# EAGLE board DaftPunk (EAGLE 5.08)
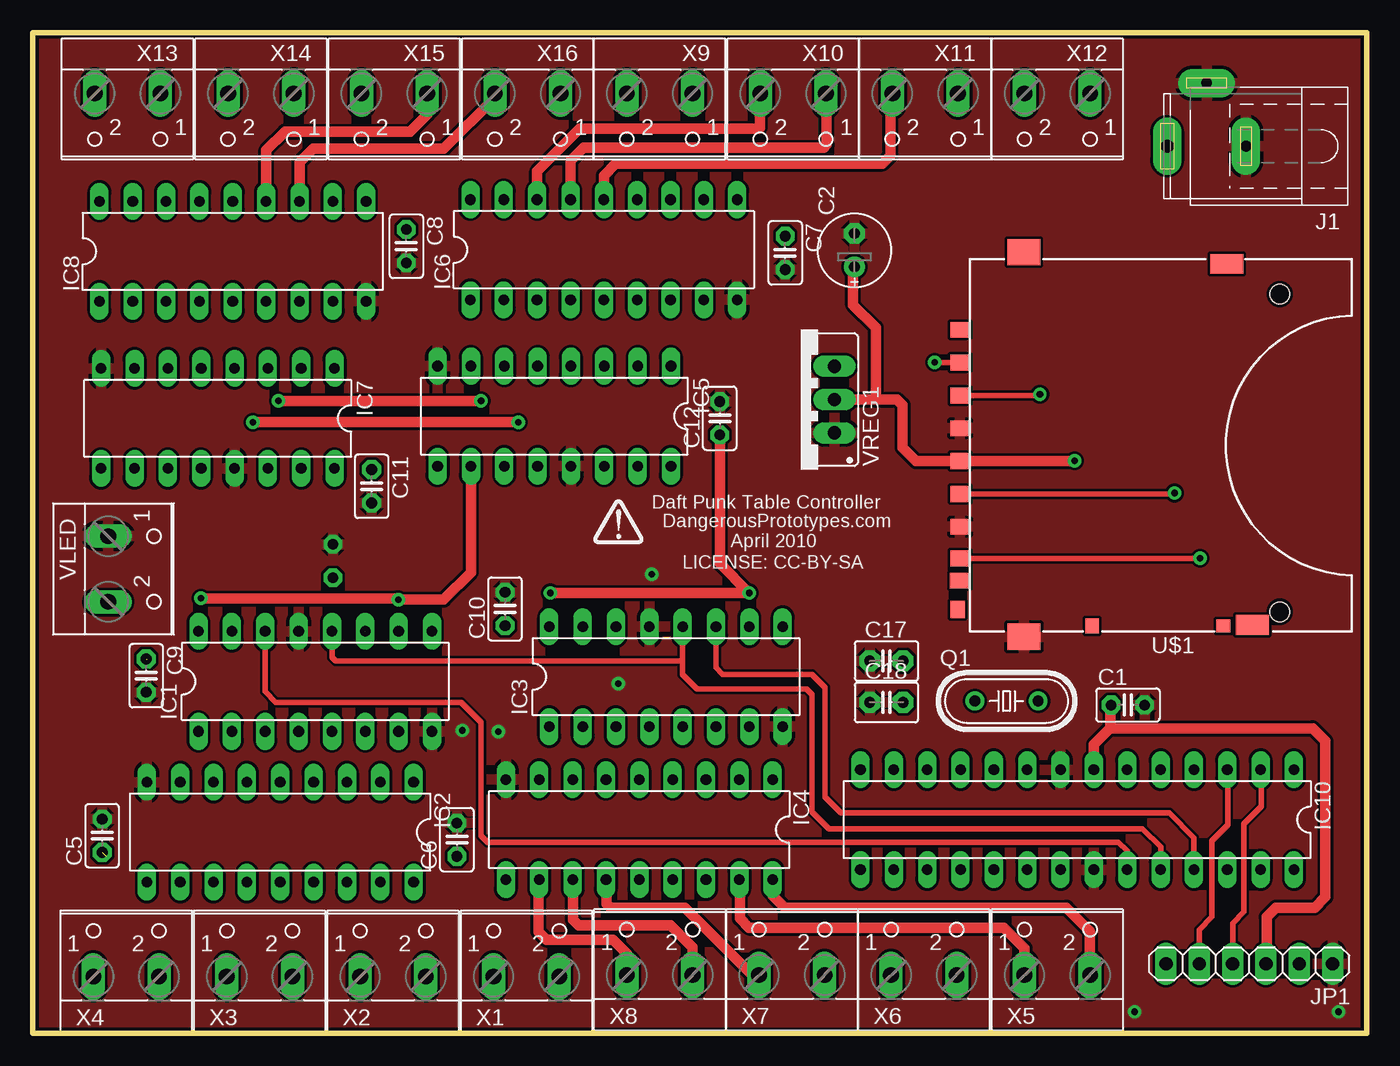
[diagram p0: board, top side]
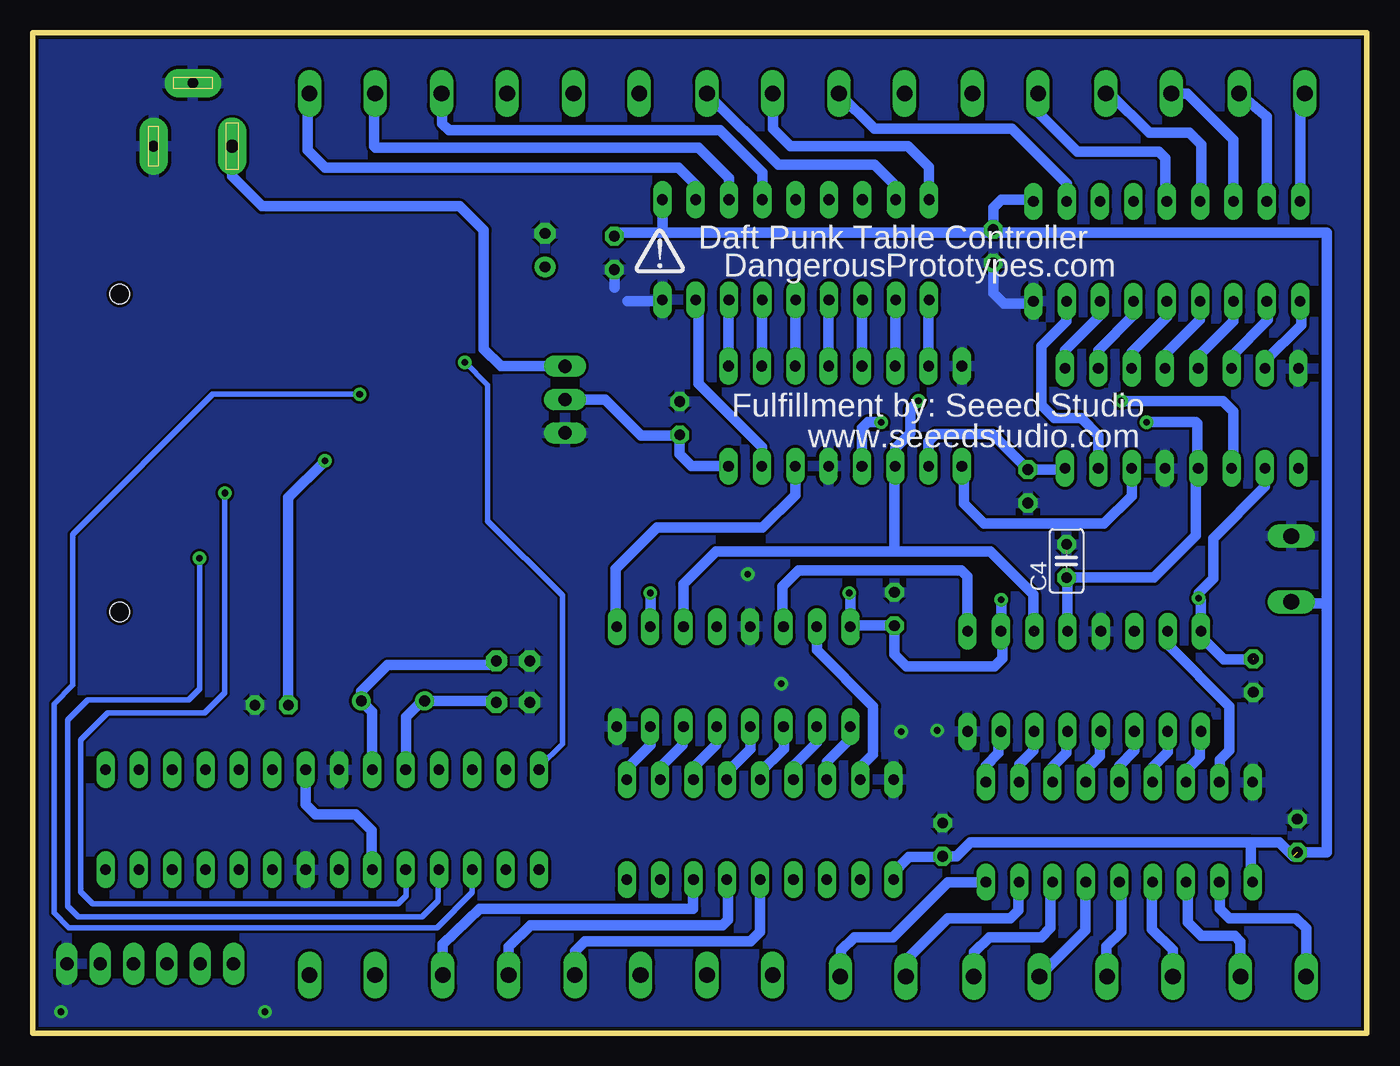
[diagram p1: board, bottom side, seen from below]

Size 101.6 x 76.2 mm. Coordinates in mm from the lower left corner, seen from the top.
Outline: 0,0 101.6,0 101.6,76.2 0,76.2 0,0
Copper layers (1*16): Top 0.035mm / dielectric 1.5mm / Bottom 0.035mm
Design rules "SparkFun": minimum track width 8mil, minimum drill 20mil, track to track 8mil, track to pad 8mil, pad to pad 8mil, via to via 8mil, smd to smd 8mil, copper to edge 10mil, drill to drill 8mil, minimum pad ring 12mil, minimum via ring 10mil, stop-mask expansion 4mil, vias tented up to drill 25mil, thermal gap 10mil

## Footprints (pad centres in the part's own frame; a part is rotated, then mirrored left to right if it is on the bottom)
C025-025X050 = drill 0.813 octagon: 1 -1.27,0; 2 1.27,0
E2,5-6E = drill 0.813 pad 1.575 round: + -1.27,0 | drill 0.813 pad 1.575 octagon: - 1.27,0
C2.5-3 = drill 0.813 pad 1.6 octagon: 1 -1.27,0; 2 1.27,0
DIL16 = drill 0.813 long: 1 -8.89,-3.81; 2 -6.35,-3.81; 3 -3.81,-3.81; 4 -1.27,-3.81; 5 1.27,-3.81; 6 3.81,-3.81; 7 6.35,-3.81; 8 8.89,-3.81; 9 8.89,3.81; 10 6.35,3.81; 11 3.81,3.81; 12 1.27,3.81; 13 -1.27,3.81; 14 -3.81,3.81; 15 -6.35,3.81; 16 -8.89,3.81
DIL18 = drill 0.813 long: 1 -10.16,-3.81; 2 -7.62,-3.81; 3 -5.08,-3.81; 4 -2.54,-3.81; 5 0,-3.81; 6 2.54,-3.81; 7 5.08,-3.81; 8 7.62,-3.81; 9 10.16,-3.81; 10 10.16,3.81; 11 7.62,3.81; 12 5.08,3.81; 13 2.54,3.81; 14 0,3.81; 15 -2.54,3.81; 16 -5.08,3.81; 17 -7.62,3.81; 18 -10.16,3.81
DIL28-N = drill 0.813 long: 1 -16.51,-3.81; 2 -13.97,-3.81; 3 -11.43,-3.81; 4 -8.89,-3.81; 5 -6.35,-3.81; 6 -3.81,-3.81; 7 -1.27,-3.81; 8 1.27,-3.81; 9 3.81,-3.81; 10 6.35,-3.81; 11 8.89,-3.81; 12 11.43,-3.81; 13 13.97,-3.81; 14 16.51,-3.81; 15 16.51,3.81; 16 13.97,3.81; 17 11.43,3.81; 18 8.89,3.81; 19 6.35,3.81; 20 3.81,3.81; 21 1.27,3.81; 22 -1.27,3.81; 23 -3.81,3.81; 24 -6.35,3.81; 25 -8.89,3.81; 26 -11.43,3.81; 27 -13.97,3.81; 28 -16.51,3.81
SPC4078 = drill 0.8 pad 2.184 long: 1 -3,0; 2 0,-4.8 | drill 1 pad 2.184 long: 3 3,0
1X06 = drill 1.016 long: 1 -6.35,0; 2 -3.81,0; 3 -1.27,0; 4 1.27,0; 5 3.81,0; 6 6.35,0
HC49/S = drill 0.813 round: 1 -2.413,0; 2 2.413,0
SD-MMC_SOCKET-PP = smd 1.2 x 1.5: 1 6.88,29.85; 2 4.38,29.85; 3 1.88,29.85; 4 -0.62,29.85; 5 -3.12,29.85; 6 -5.62,29.85; 7 -8.04,29.85; 8 -9.728,29.87; 9 9.38,29.85 | smd 1.5 x 2.5: 12 -13.1,7.6; 13 14.402,9.525 | smd 2 x 2.5: 14 -14,25; 15 15.3,25 | smd 1 x 1.05: CD -13.18,9.8 | smd 1.3 x 1.1: SW -11.938,30.048 | smd 1.15 x 1: WP -13.18,19.8 | hole 1.5: -12.1,5.5; 12.1,5.5
W237-102 = drill 1.194 long: 1 -2.5,-1.27; 2 2.5,-1.27
TO220-V = drill 1.016 long: 1 -2.54,0; 2 0,0; 3 2.54,0

## Placement (x,y rotation side)
C1  [C025-025X050]  83.41,24.99 0 top
C2  [E2,5-6E]  62.59,59.64 90 top
C4  [C025-025X050]  22.86,35.97 90 bottom
C5  [C025-025X050]  5.28,15.04 90 top
C6  [C025-025X050]  32.31,14.73 90 top
C7  [C025-025X050]  57.3,59.44 270 top
C8  [C025-025X050]  28.45,59.94 270 top
C9  [C025-025X050]  8.64,27.23 270 top
C10  [C025-025X050]  35.97,32.31 90 top
C11  [C025-025X050]  25.81,41.66 270 top
C12  [C025-025X050]  52.32,46.84 90 top
C17  22pF  [C2.5-3]  65.02,28.35 0 top
C18  22pF  [C2.5-3]  65.02,25.2 0 top
IC1  74HC595N  [DIL16]  21.51,26.79 0 top
IC2  [DIL18]  18.84,15.3 180 top
IC3  74HC595N  [DIL16]  48.23,27.16 0 top
IC4  [DIL18]  46.2,15.51 180 top
IC5  74HC595N  [DIL16]  39.72,47 180 top
IC6  [DIL18]  43.49,59.68 0 top
IC7  74HC595N  [DIL16]  14.09,46.83 180 top
IC8  [DIL18]  15.23,59.56 0 top
IC10  ATMEGA328P  [DIL28-N]  79.55,16.26 180 top
J1  [SPC4078]  89.41,67.56 180 top
JP1  [1X06]  92.66,5.28 180 top
Q1  16MHZ  [HC49/S]  74.17,25.3 0 top
U$1  SD_CARD_SOCKETSD  [SD-MMC_SOCKET-PP]  100.48,44.2 90 top
U$2  [DP_LOGO]  44.6,37.9 0 top
U$3  [DP_LOGO]  53.85,58.52 0 bottom
VLED  [W237-102]  7.01,35.36 270 top
VREG1  LD1117-3.3  [TO220-V]  61.06,48.26 90 top
X1  [W237-102]  37.59,5.59 0 top
X2  [W237-102]  27.43,5.59 0 top
X3  [W237-102]  17.27,5.59 0 top
X4  [W237-102]  7.11,5.59 0 top
X5  [W237-102]  78.03,5.69 0 top
X6  [W237-102]  67.87,5.69 0 top
X7  [W237-102]  57.81,5.69 0 top
X8  [W237-102]  47.75,5.69 0 top
X9  [W237-102]  47.75,70.31 180 top
X10  [W237-102]  57.91,70.31 180 top
X11  [W237-102]  67.97,70.31 180 top
X12  [W237-102]  78.03,70.31 180 top
X13  [W237-102]  7.21,70.31 180 top
X14  [W237-102]  17.37,70.31 180 top
X15  [W237-102]  27.53,70.31 180 top
X16  [W237-102]  37.69,70.31 180 top

## Library data of the parts
C1 C2 C4-C12 = rcl
C17 C18 = capacitor-wima
IC1 IC3 IC5 IC7 = 74xx-eu
IC2 IC4 IC6 IC8 = uln-udn
IC10 U$2 U$3 VREG1 = dp_devices
J1 = con-jack
JP1 = pinhead
Q1 = crystal
U$1 = SparkFun-3-2-07
VLED X1-X16 = con-wago-500

## Nets
CS: IC10.14 U$1.1
DI: IC10.17 U$1.2
DO: IC10.18 U$1.7
GND: C1.2 C2.- C4.2 C5.2 C6.2 C7.2 C8.2 C9.2 C10.2 C11.2 C12.2 C17.1 C18.1 IC1.8 IC1.13 IC2.9 IC3.8 IC3.13 IC4.9 IC5.8 IC5.13 IC6.9 IC7.8 IC7.13 IC8.9 IC10.8 IC10.22 J1.1 J1.2 JP1.1 U$1.3 U$1.6 U$1.14 VLED.1 VREG1.1
N$1: IC1.15 IC2.8
N$2: IC1.1 IC2.7
N$3: IC1.2 IC2.6
N$4: IC1.3 IC2.5
N$5: IC1.4 IC2.4
N$6: IC1.5 IC2.3
N$7: IC1.6 IC2.2
N$8: IC1.7 IC2.1
N$9: IC3.15 IC4.8
N$10: IC3.1 IC4.7
N$11: IC3.2 IC4.6
N$12: IC3.3 IC4.5
N$13: IC3.4 IC4.4
N$14: IC3.5 IC4.3
N$15: IC3.6 IC4.2
N$16: IC3.7 IC4.1
N$17: IC5.15 IC6.8
N$18: IC5.1 IC6.7
N$19: IC5.2 IC6.6
N$20: IC5.3 IC6.5
N$21: IC5.4 IC6.4
N$22: IC5.5 IC6.3
N$23: IC5.6 IC6.2
N$24: IC5.7 IC6.1
N$25: IC7.15 IC8.8
N$26: IC7.1 IC8.7
N$27: IC7.2 IC8.6
N$28: IC7.3 IC8.5
N$29: IC7.4 IC8.4
N$30: IC7.5 IC8.3
N$31: IC7.6 IC8.2
N$32: IC7.7 IC8.1
N$33: IC1.9 IC3.14
N$34: IC3.9 IC5.14
N$35: IC5.9 IC7.14
N$36: IC2.18 X1.2
N$37: IC2.17 X1.1
N$38: IC2.16 X2.2
N$39: IC2.15 X2.1
N$40: IC2.14 X3.2
N$41: IC2.13 X3.1
N$42: IC2.12 X4.2
N$43: IC2.11 X4.1
N$44: IC4.18 X5.2
N$45: IC4.17 X5.1
N$46: IC4.16 X6.2
N$47: IC4.15 X6.1
N$48: IC4.14 X7.2
N$49: IC4.13 X7.1
N$50: IC4.12 X8.2
N$51: IC4.11 X8.1
N$52: IC6.18 X9.2
N$53: IC6.17 X9.1
N$54: IC6.16 X10.2
N$55: IC6.15 X10.1
N$56: IC6.14 X11.2
N$57: IC6.13 X11.1
N$58: IC6.12 X12.2
N$59: IC6.11 X12.1
N$60: IC8.18 X13.2
N$61: IC8.17 X13.1
N$62: IC8.16 X14.2
N$63: IC8.15 X14.1
N$64: IC8.14 X15.2
N$65: IC8.13 X15.1
N$66: IC8.12 X16.2
N$67: IC8.11 X16.1
N$71: J1.3 VREG1.3
RCK: C4.1 IC1.12 IC3.12 IC5.12 IC7.12 IC10.24
RXD: IC10.2 JP1.4
SCK: IC10.19 U$1.5
SCLK: IC1.11 IC3.11 IC5.11 IC7.11 IC10.25
SER: IC1.14 IC10.23
TXD: IC10.3 JP1.5
VCC: C1.1 C2.+ C9.1 C10.1 C11.1 C12.1 IC1.10 IC1.16 IC3.10 IC3.16 IC5.10 IC5.16 IC7.10 IC7.16 IC10.7 IC10.20 JP1.3 U$1.4 VREG1.2
VLED: C5.1 C6.1 C7.1 C8.1 IC2.10 IC4.10 IC6.10 IC8.10 VLED.2
XTAL1: C17.2 IC10.9 Q1.2
XTAL2: C18.2 IC10.10 Q1.1

## Tracks (layer width: path | path; a pad name or v marks a point on that pad's centre or on a via)
CS  (via drill 0.51)
  Top 0.406: U$1.1 68.68,51.08 v68.68,51.1
  Bottom 0.406: v68.68,51.1 66.95,49.38 66.95,39.01 61.27,33.33 61.27,22.05 63.04,20.27 IC10.14
DI  (via drill 0.51)
  Top 0.406: v76.71,48.67 76.62,48.58 U$1.2
  Bottom 0.406: v76.71,48.67 87.88,48.67 98.55,38 98.55,26.52 99.97,25.09 99.97,9.14 98.86,8.03 70.81,8.03 68.12,10.72 IC10.17
DO  (via drill 0.51)
  Top 0.406: v88.9,36.17 88.89,36.16 U$1.7
  Bottom 0.406: IC10.18 70.71,12.39 70.71,10.06 71.93,8.84 98.15,8.84 98.96,9.65 98.96,23.88 97.43,25.4 89.71,25.4 88.9,26.21 v88.9,36.17
GND  (via drill 0.51)
  Bottom 0.813: IC8.9 25.56,55.58 27.64,55.58 28.45,56.39 C8.2 | IC6.9 53.74,55.78 56.29,55.78 | C7.2 57.3,56.79
  other vias: 99.47,1.63 35.46,22.96 32.72,23.06 47.14,34.95 83.92,1.63 44.6,26.62
  pour Bottom: 102.51,77.52 102.51,-2.74 -0.61,-2.74 -0.61,77.52
  pour Top: -1.12,77.93 103.12,77.93 103.12,-3.76 -1.32,-3.76 -1.32,77.72
N$1
  Bottom 0.813: IC2.8 11.18,19.16 11.18,20.83 10.46,21.54 10.46,24.89 15.16,29.59 IC1.15
N$2
  Bottom 0.813: IC1.1 12.7,22.91 12.7,21.03 13.77,19.97 IC2.7
N$3
  Bottom 0.813: IC1.2 15.14,22.96 15.14,21.44 16.3,20.27 IC2.6
N$4
  Bottom 0.813: IC1.3 17.68,22.96 17.68,21.54 18.84,20.37 IC2.5
N$5
  Bottom 0.813: IC1.4 20.32,22.91 20.32,21.13 21.39,20.07 IC2.4
N$6
  Bottom 0.813: IC1.5 22.86,22.91 22.86,21.34 23.93,20.27 IC2.3
N$7
  Bottom 0.813: IC1.6 25.4,22.91 25.4,21.54 26.46,20.47 IC2.2
N$8
  Bottom 0.813: IC1.7 28.04,22.8 28.04,21.34 29,20.37 IC2.1
N$9
  Bottom 0.813: IC4.8 38.51,19.39 38.51,20.32 37.59,21.23 37.59,24.89 41.88,29.18 IC3.15
N$10
  Bottom 0.813: IC3.1 39.42,23.26 39.42,22.35 41.12,20.66 IC4.7
N$11
  Bottom 0.813: IC3.2 41.86,23.32 41.86,22.15 43.66,20.35 IC4.6
N$12
  Bottom 0.813: IC3.3 44.4,23.32 44.4,21.64 46.2,19.84 IC4.5
N$13
  Bottom 0.813: IC3.4 46.94,23.32 46.94,21.64 48.74,19.84 IC4.4
N$14
  Bottom 0.813: IC3.5 49.58,23.26 49.58,21.95 51.28,20.25 IC4.3
N$15
  Bottom 0.813: IC3.6 52.12,23.26 52.12,21.95 53.82,20.25 IC4.2
N$16
  Bottom 0.813: IC3.7 54.56,23.32 54.56,21.95 56.36,20.15 IC4.1
N$17
  Bottom 0.813: IC6.8 50.9,55.66 50.9,49.48 46.07,44.65 IC5.15
N$18
  Bottom 0.813: IC6.7 48.61,55.83 IC5.1
N$19
  Bottom 0.813: IC6.6 46.07,55.83 IC5.2
N$20
  Bottom 0.813: IC6.5 43.53,55.83 IC5.3
N$21
  Bottom 0.813: IC6.4 40.99,55.83 IC5.4
N$22
  Bottom 0.813: IC6.3 38.45,55.83 IC5.5
N$23
  Bottom 0.813: IC6.2 35.91,55.83 IC5.6
N$24
  Bottom 0.813: IC6.1 33.37,55.83 IC5.7
N$25
  Bottom 0.813: IC8.8 22.86,55.73 22.86,54.25 24.79,52.32 24.79,47.85 23.77,46.84 21.74,46.84 20.44,45.54 IC7.15
N$26
  Bottom 0.813: IC8.7 20.42,55.63 20.42,54.56 22.98,52 IC7.1
N$27
  Bottom 0.813: IC8.6 17.68,55.66 17.68,54.76 20.44,52 IC7.2
N$28
  Bottom 0.813: IC8.5 15.24,55.73 15.24,54.56 17.9,51.9 IC7.3
N$29
  Bottom 0.813: IC8.4 12.7,55.73 12.7,54.36 15.36,51.69 IC7.4
N$30
  Bottom 0.813: IC8.3 10.16,55.73 10.16,54.25 12.82,51.59 IC7.5
N$31
  Bottom 0.813: IC8.2 7.52,55.66 7.52,54.36 10.28,51.59 IC7.6
N$32
  Bottom 0.813: IC8.1 4.98,55.66 4.98,53.95 7.74,51.19 IC7.7
N$33
  Bottom 0.813: IC3.14 44.5,31.05 44.5,34.04 43.28,35.26 30.89,35.26 30.4,34.77 IC1.9
N$34
  Bottom 0.813: IC3.9 57.2,31.05 57.2,35.36 54.05,38.51 46.02,38.51 43.53,41 IC5.14
N$35
  Bottom 0.813: IC5.9 30.68,43.04 30.68,40.34 29.16,38.81 20.02,38.81 17.9,40.92 IC7.14
N$36
  Bottom 0.813: X1.2 40.03,4.38 40.03,6.3 39.01,7.32 36.07,7.32 31.89,11.49 IC2.18
N$37
  Bottom 0.813: IC2.17 26.52,11.44 26.52,9.35 27.13,8.74 31.9,8.74 35.09,5.55 X1.1
N$38
  Bottom 0.813: IC2.16 24.08,11.34 24.08,8.03 24.79,7.32 28.75,7.32 29.93,6.14 X2.2
N$39
  Bottom 0.813: IC2.15 21.44,11.44 21.44,7.82 X2.1
N$40
  Bottom 0.813: IC2.14 18.69,11.34 18.69,7.72 19.81,6.6 19.81,3.76 19.77,3.8 X3.2
N$41
  Bottom 0.813: IC2.13 16.36,11.44 16.36,7.92 14.77,6.34 X3.1
N$42
  Bottom 0.813: IC2.12 13.61,11.34 13.61,8.43 12.6,7.42 10.06,7.42 9.61,6.97 X4.2
N$43
  Bottom 0.813: IC2.11 11.18,11.45 11.18,9.45 10.46,8.74 5.38,8.74 4.61,7.96 X4.1
N$44
  Top 0.813: IC4.18 56.39,11.77 56.39,10.46 57.3,9.55 78.74,9.55 80.53,7.76 X5.2
N$45
  Top 0.813: IC4.17 53.85,11.77 53.85,8.74 54.56,8.03 73.97,8.03 75.53,6.46 X5.1
N$46
  Bottom 0.813: IC4.16 51.31,11.77 51.31,9.45 67.56,9.45 70.37,6.75 X6.2
N$47
  Bottom 0.813: IC4.15 48.67,11.73 48.67,8.64 49.07,8.23 63.7,8.23 65.37,6.56 X6.1
N$48
  Bottom 0.813: IC4.14 46.23,11.77 46.23,7.72 46.94,7.01 59.54,7.01 60.31,6.24 X7.2
N$49
  Top 0.813: IC4.13 43.69,11.77 43.69,9.86 43.99,9.55 49.68,9.55 54.81,4.42 X7.1
N$50
  Top 0.813: IC4.12 41.15,11.77 41.15,8.64 41.55,8.23 48.56,8.23 50.25,6.54 X8.2
N$51
  Top 0.813: IC4.11 38.51,11.73 38.51,7.72 39.12,7.11 44.2,7.11 45.25,6.06 X8.1
N$52
  Bottom 0.813: X9.2 45.21,71.54 45.21,68.89 43.89,67.56 34.95,67.56 33.33,65.95 IC6.18
N$53
  Bottom 0.813: X9.1 44.82,66.14 37.49,66.14 35.87,64.52 IC6.17
N$54
  Top 0.813: X10.2 55.37,71.54 55.37,68.99 55.27,68.89 41.66,68.89 38.41,65.64 IC6.16
N$55
  Top 0.813: X10.1 60.45,71.54 60.45,67.67 60.25,67.46 41.96,67.46 40.95,66.45 IC6.15
N$56
  Top 0.813: X11.2 65.33,71.44 65.33,66.85 64.72,66.24 44.4,66.24 43.49,65.34 IC6.14
N$57
  Bottom 0.813: X11.1 70.41,71.52 70.41,69.29 69.9,68.78 49.28,68.78 46.03,65.54 IC6.13
N$58
  Bottom 0.813: X12.2 75.59,71.52 75.59,67.56 75.49,67.46 50.9,67.46 48.57,65.13 IC6.12
N$59
  Bottom 0.813: X12.1 80.67,71.44 80.67,67.26 79.35,65.94 52.43,65.94 51.11,64.63 IC6.11
N$60
  Bottom 0.813: X13.2 5.07,71.58 IC8.18
N$61
  Bottom 0.813: IC8.17 7.62,69.8 X13.1
N$62
  Bottom 0.813: IC8.16 10.16,63.38 10.16,68.07 13.66,71.58 X14.2
N$63
  Bottom 0.813: IC8.15 12.6,63.46 12.6,67.67 13.51,68.58 16.56,68.58 19.56,71.58 X14.1
N$64
  Bottom 0.813: IC8.14 15.34,63.48 15.34,66.65 15.85,67.16 22.05,67.16 25.03,70.14 X15.2
N$65
  Top 0.813: IC8.13 17.78,63.38 17.78,67.26 19.2,68.68 28.75,68.68 30.03,69.96 X15.1
N$66
  Top 0.813: IC8.12 20.32,63.38 20.32,66.34 21.34,67.36 31.29,67.36 35.19,71.26 X16.2
N$67
  Bottom 0.813: X16.1 37.5,68.89 27.03,68.89 22.85,64.7 IC8.11
N$71
  Bottom 0.813: VREG1.3 65.94,50.8 67.26,52.12 67.26,61.16 69.09,62.99 84.12,62.99 86.41,65.28 J1.3
RCK  (via drill 0.51)
  Top 0.406: IC10.24 85.9,14.17 84.53,15.54 60.66,15.54 59.33,16.87 59.33,25.81 58.93,26.21 50.6,26.21 49.5,27.31 IC3.12 49.48,30.95 49.48,28.25 49.38,28.35 23.06,28.35 22.78,28.63 IC1.12
  Top 0.813: v16.76,46.53 v36.98,46.53
  Bottom 0.813: 12.9,43.1 IC7.12 | 12.9,43.1 12.9,46.43 13.01,46.53 v16.76,46.53 | v36.98,46.53 38,46.53 38.45,46.08 IC5.12 | 12.9,43.1 13.01,42.99 13.01,37.9 16.2,34.7 C4.1 22.78,34.62 IC1.12
RXD
  Top 0.406: IC10.2 93.57,20.02 93.57,17.27 92.25,15.95 92.25,9.25 91.39,8.38 JP1.4
SCK  (via drill 0.51)
  Top 0.406: v86.97,41.15 86.9,41.08 U$1.5
  Bottom 0.406: IC10.19 73.15,12.39 73.15,10.46 73.76,9.86 97.03,9.86 97.94,10.77 97.94,22.35 95.91,24.38 88.49,24.38 86.97,25.91 v86.97,41.15
SCLK  (via drill 0.51)  (1 unrouted)
  Top 0.406: IC3.11 52.02,30.95 52.02,27.84 52.53,27.33 59.33,27.33 60.35,26.31 60.35,17.98 61.57,16.76 86.56,16.76 88.44,14.88 IC10.25
  Top 0.813: v18.69,48.16 v34.14,48.16
  Bottom 0.813: IC7.11 10.16,43.14 10.16,47.35 10.97,48.16 v18.69,48.16 | v34.14,48.16 34.75,47.55 34.75,45.72 35.91,44.56 IC5.11 35.97,43.13 35.97,36.68 | 25.3,30.58 25.4,30.68 25.4,33.43 28.65,36.68 35.97,36.68 | 35.97,36.68 49.58,36.68 52.04,34.22 IC3.11
SER
  Top 0.406: IC1.14 17.68,30.58 17.68,26.01 18.49,25.2 32.61,25.2 34.14,23.67 34.14,15.04 34.65,14.53 82.7,14.53 83.36,13.87 IC10.23
TXD
  Top 0.406: IC10.3 91.03,20.02 91.03,15.85 89.81,14.63 89.81,8.84 88.85,7.87 JP1.5
VCC  (via drill 0.51)  (1 unrouted)
  Top 0.813: v12.8,33.12 27.74,33.12 v27.84,33.02 31.29,33.02 33.37,35.09 IC5.10 | v39.42,33.53 v54.56,33.53 52.32,35.76 C12.1 | C2.+ 62.48,58.27 62.48,55.47 64.21,53.75 64.21,48.26 | VREG1.2 64.21,48.26 | 64.21,48.26 65.84,48.26 66.24,47.85 66.24,44.6 67.27,43.58 U$1.4 70.64,43.59 v79.35,43.59 | C1.1 82.09,24.94 82.09,23.27 82.04,23.22 | 82.04,23.22 80.82,22 IC10.7 | JP1.3 93.98,5.33 93.98,8.84 94.69,9.55 97.64,9.55 98.45,10.36 98.45,22.25 97.48,23.22 82.04,23.22
  Bottom 0.813: IC7.16 23.07,42.93 C11.1 28.5,45.62 32.82,45.62 33.37,45.07 IC5.10 | IC5.16 51.41,43.18 52.32,44.09 C12.1 52.38,45.52 55.27,45.52 58.01,48.26 VREG1.2 | IC3.16 39.52,31.15 39.52,31.5 39.06,31.04 | v27.84,33.02 27.84,30.63 IC1.10 27.74,30.48 27.74,28.55 28.35,27.94 35.05,27.94 35.97,28.85 C10.1 39.27,31.04 IC3.16 | IC3.10 54.56,30.99 v54.56,33.53 | v39.42,33.53 39.34,33.45 IC3.16 | IC7.10 7.74,41.64 11.68,37.69 11.68,34.65 12.8,33.53 v12.8,33.12 12.62,32.94 IC1.16 12.62,30.2 10.87,28.45 8.69,28.45 | IC10.20 75.79,12.5 75.79,15.44 77.01,16.66 80.06,16.66 80.82,17.42 IC10.7 | v79.35,43.59 82.14,40.79 C1.1
VLED  (1 unrouted)
  Bottom 0.813: IC8.10 25.52,63.5 27.84,63.5 28.45,62.89 C8.1 28.7,60.96 | 28.7,60.96 53.65,60.96 | 53.65,60.96 53.65,61.48 IC6.10 | C7.1 57.05,60.96 53.65,60.96 | IC4.10 36.04,12.22 34.85,13.41 32.36,13.41 C6.1 31.24,13.46 30.18,14.53 8.84,14.53 | 28.7,60.96 3.05,60.96 3.05,32.72 | 3.05,32.72 3.05,13.77 C5.1 | VLED.2 5.74,32.72 3.05,32.72 | 5.59,13.46 6.66,14.53 8.84,14.53 | IC2.10 8.84,11.65 8.84,14.53
XTAL1
  Bottom 0.813: C17.2 66.6,28.04 74.57,28.04 76.58,26.04 Q1.2 75.74,24.46 IC10.9
XTAL2
  Bottom 0.813: IC10.10 73.15,20.12 73.15,24.08 71.93,25.3 Q1.1 66.4,25.3 C18.2

## Text on the board
tNames: Daft Punk Table Controller | DangerousPrototypes.com | April 2010 | LICENSE: CC-BY-SA
bNames: Daft Punk Table Controller | DangerousPrototypes.com | Fulfillment by: Seeed Studio | www.seeedstudio.com